# EAGLE board 909 Rim_potless (EAGLE 7.1.0)
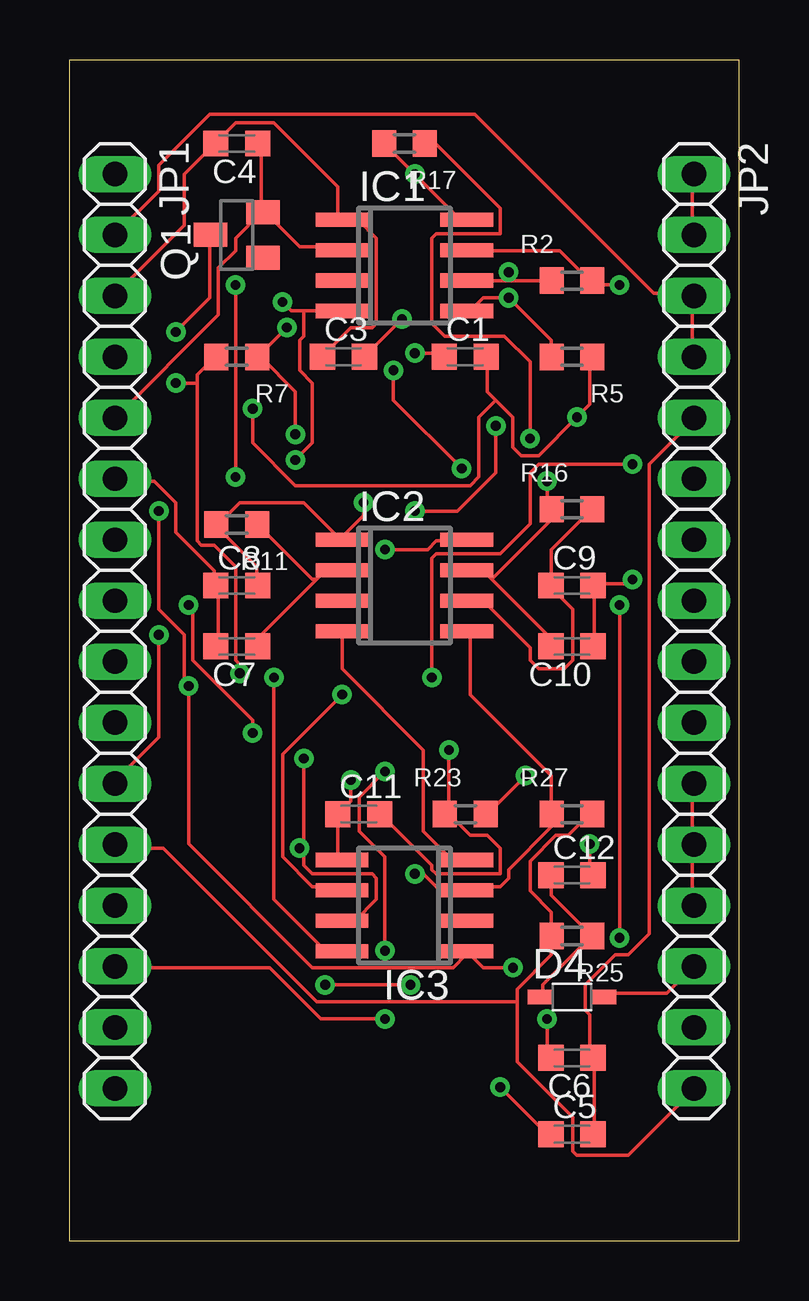
[diagram p0: board, top side]
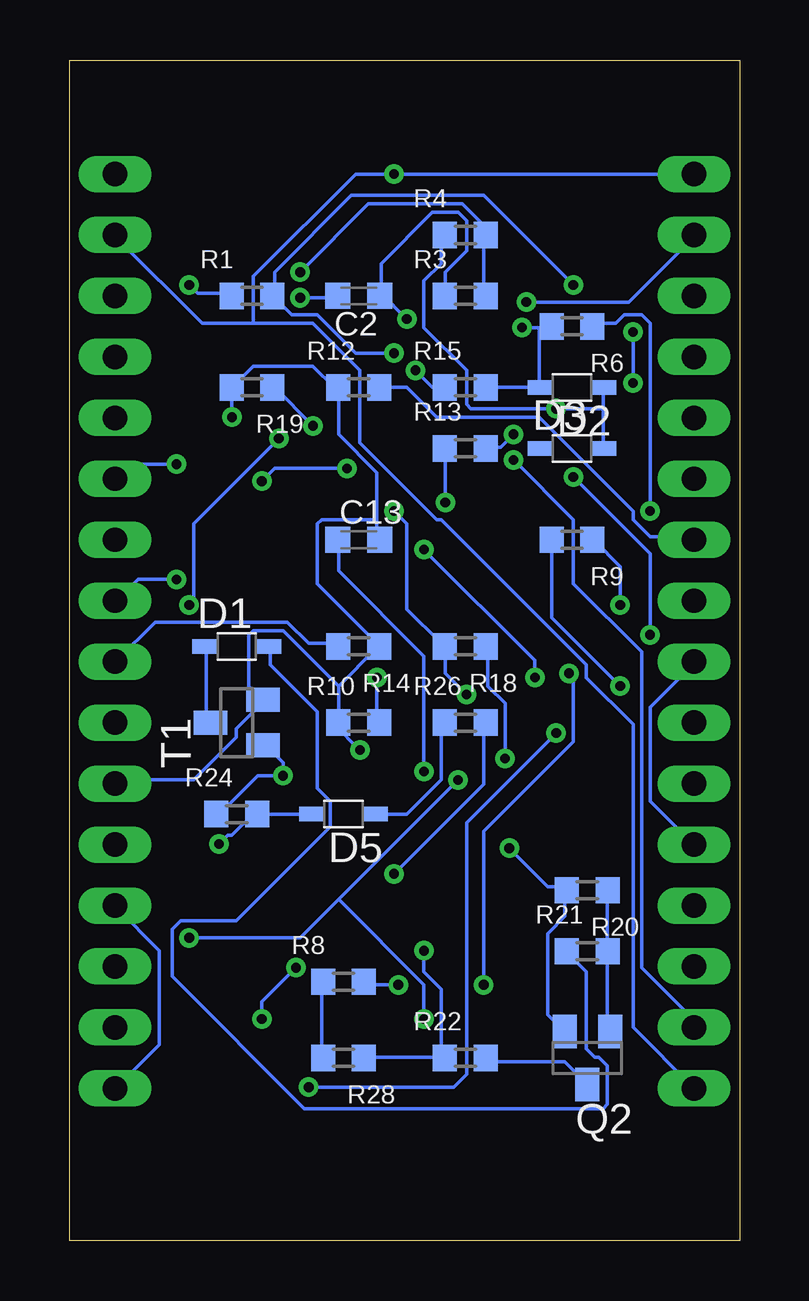
[diagram p1: board, bottom side, seen from below]

Size 27.92 x 49.2 mm. Coordinates in mm from the lower left corner, seen from the top.
Outline: 0,0 27.92,0 27.92,49.2 0,49.2 0,0
Copper layers (1*16): Top 0.035mm / dielectric 1.5mm / Bottom 0.035mm
Design rules "default *": minimum track width 6mil, minimum drill 16mil, track to track 8mil, track to pad 8mil, pad to pad 8mil, via to via 8mil, smd to smd 8mil, copper to edge 40mil, drill to drill 8mil, minimum pad ring 10mil, minimum via ring 8mil, stop-mask expansion 4mil, vias tented up to drill 0mil, thermal gap 10mil

## Footprints (pad centres in the part's own frame; a part is rotated, then mirrored left to right if it is on the bottom)
C0603K = smd 1.05 x 1.08: 1 -0.875,0; 2 0.875,0
SOD323W_INFINEON = smd 1 x 0.6: A 1.35,0; C -1.35,0
SO08 = smd 0.6 x 2.2: 1 -1.905,-2.6; 2 -0.635,-2.6; 3 0.635,-2.6; 4 1.905,-2.6; 5 1.905,2.6; 6 0.635,2.6; 7 -0.635,2.6; 8 -1.905,2.6
1X16 = drill 1.016 long: 1 -19.05,0; 2 -16.51,0; 3 -13.97,0; 4 -11.43,0; 5 -8.89,0; 6 -6.35,0; 7 -3.81,0; 8 -1.27,0; 9 1.27,0; 10 3.81,0; 11 6.35,0; 12 8.89,0; 13 11.43,0; 14 13.97,0; 15 16.51,0; 16 19.05,0
SOT23 = smd 1 x 1.4: 1 -0.95,-1.1; 2 0.95,-1.1; 3 0,1.1
SOT23-BEC = smd 1 x 1.4: B -0.95,-1.1; C 0,1.1; E 0.95,-1.1
R0603 = smd 1 x 1.1: 1 -0.85,0; 2 0.85,0

## Placement (x,y rotation side)
C1  0.33uF  [C0603K]  16.51,36.83 0 top
C2  0.33uF  [C0603K]  15.88,39.37 180 bottom
C3  0.33uF  [C0603K]  11.43,36.83 0 top
C4  0.33uF  [C0603K]  6.99,45.72 180 top
C5  0.33uF  [C0603K]  20.95,4.45 0 top
C6  0.33uF  [C0603K]  20.95,7.62 180 top
C7  0.33uF  [C0603K]  6.99,24.77 180 top
C8  0.33uF  [C0603K]  6.99,27.3 0 top
C9  0.33uF  [C0603K]  20.95,27.3 0 top
C10  0.33uF  [C0603K]  20.95,24.77 180 top
C11  100pF  [C0603K]  12.06,17.78 0 top
C12  0.33uF  [C0603K]  20.95,15.24 0 top
C13  0.33uF  [C0603K]  15.88,29.21 0 bottom
D1  1N4148  [SOD323W_INFINEON]  20.95,24.77 0 bottom
D2  1N4148  [SOD323W_INFINEON]  6.99,35.56 180 bottom
D3  1N4148  [SOD323W_INFINEON]  6.99,33.02 0 bottom
D4  1N4148  [SOD323W_INFINEON]  20.95,10.16 0 top
D5  1N4148  [SOD323W_INFINEON]  16.51,17.78 180 bottom
IC1  TL072D  [SO08]  13.97,40.64 270 top
IC2  TL072D  [SO08]  13.97,27.3 270 top
IC3  TL072D  [SO08]  13.97,13.97 90 top
JP1  [1X16]  1.91,25.4 270 top
JP2  [1X16]  26.04,25.4 270 top
Q1  BC549  [SOT23]  6.99,41.91 90 top
Q2  BC859  [SOT23-BEC]  6.35,7.62 180 bottom
R1  1K  [R0603]  20.32,39.37 0 bottom
R2  4.7K  [R0603]  20.95,40.01 0 top
R3  22K  [R0603]  11.43,39.37 0 bottom
R4  4.7K  [R0603]  11.43,41.91 0 bottom
R5  220K  [R0603]  20.95,36.83 180 top
R6  22K  [R0603]  6.99,38.1 180 bottom
R7  22K  [R0603]  6.99,36.83 180 top
R8  680R  [R0603]  16.51,10.79 0 bottom
R9  22K  [R0603]  6.99,29.21 180 bottom
R10  22K  [R0603]  15.88,21.59 0 bottom
R11  22K  [R0603]  6.99,29.84 180 top
R12  22K  [R0603]  15.88,35.56 0 bottom
R13  22K  [R0603]  11.43,33.02 0 bottom
R14  22K  [R0603]  15.88,24.77 180 bottom
R15  22K  [R0603]  11.43,35.56 0 bottom
R16  22K  [R0603]  20.95,30.48 0 top
R17  100k  [R0603]  13.97,45.72 180 top
R18  10k  [R0603]  11.43,24.77 180 bottom
R19  4.7k  [R0603]  20.32,35.56 180 bottom
R20  [R0603]  6.35,14.61 180 bottom
R21  [R0603]  6.35,12.06 0 bottom
R22  [R0603]  11.43,7.62 0 bottom
R23  [R0603]  16.51,17.78 0 top
R24  [R0603]  20.95,17.78 0 bottom
R25  [R0603]  20.95,12.7 180 top
R26  [R0603]  11.43,21.59 0 bottom
R27  [R0603]  20.95,17.78 0 top
R28  [R0603]  16.51,7.62 180 bottom
T1  BC849  [SOT23]  20.95,21.59 90 bottom

## Library data of the parts
C1-C13 = resistor
D1-D5 = 0000-master
IC1-IC3 = linear
JP1 JP2 = pinhead
Q1 T1 = transistor-neu-to92
Q2 = transistor-pnp
R1-R28 = resistor; SPICEPREFIX: R

## Nets
+12V: IC1.8 JP1.1 JP1.16 JP2.1 JP2.2 R17.2
-12V: IC1.4 JP1.2 JP1.15 JP2.3 JP2.4
ACC_NORM: JP1.13
ACC_TIP: C11.1 IC3.5 JP1.14 R17.1
GND: C1.2 C11.2 C13.2 D2.C D3.A JP1.9 JP1.12 JP2.11 JP2.12 JP2.13 JP2.16 R4.1 R5.1 R10.1 R12.1 R14.1 R19.2 R23.1 R25.2 R27.2 T1.2
N$1: IC1.7 R1.1 R2.2
N$3: C2.1 C3.2 R3.1
N$4: C2.2 IC1.5 R5.2
N$5: IC1.6 R2.1 R3.2 R4.2
N$8: D2.A R6.2 R7.1 R13.2 R15.2
N$9: C6.2 IC3.1 R6.1 R9.2
N$10: Q1.3 R7.2 R8.2
N$11: C5.1 R9.1
N$15: C10.2 IC2.7 R15.1 R16.1
N$17: C8.2 IC2.1 R11.2 R13.1
N$18: C9.1 IC2.6 R16.2
N$19: R8.1 R28.2
N$21: IC3.6 R18.2 R19.1
N$22: IC3.7 Q2.E R18.1 R20.2
N$23: Q2.B R20.1 R21.2
N$24: Q2.C R22.2
N$25: D1.A R21.1
N$26: D5.C R26.1
N$27: C12.1 D4.C R25.1
N$28: C12.2 D5.A R24.2
N$29: IC2.5 IC3.3 R26.2 R27.1
N$30: R23.2 R24.1 T1.1
N$31: D1.C T1.3
N$32: C13.1 R22.1 R28.1
N$37: C7.1 IC2.2 R11.1
OUT_NORM: JP1.10
OUT_TIP: C1.1 JP1.11 R1.2
POT1_1: C3.1 C4.2 IC1.1 JP1.3
POT1_2: JP1.4
POT1_3: C4.1 IC1.2 JP1.5 Q1.2
POT2_1: C5.2 C6.1 JP2.5
POT2_2: JP2.6 R10.2
POT2_3: JP2.7
POT3_1: C7.2 C8.1 JP1.6
POT3_2: JP1.7 R12.2
POT3_3: JP1.8
POT4_1: C9.2 C10.1 JP2.8
POT4_2: JP2.9 R14.2
POT4_3: JP2.10
TRIG_NORM: JP2.15
TRIG_TIP: D4.A JP2.14
V+: IC2.8 IC3.8
V-: IC2.4 IC3.4

## Tracks (layer width: path | path; a pad name or v marks a point on that pad's centre or on a via)
+12V  (via drill 0.41)
  Top 0.152: R17.2 13.16,45.7 v14.4,44.45 16.18,42.67 16.54,42.67 IC1.8 | JP2.1 25.96,44.45 25.96,41.96 JP2.2
  Bottom 0.152: JP1.16 4.45,8.89 4.45,21.51 6.4,23.47 6.4,24 12.45,30.05 12.62,30.05 15.82,33.25 15.82,36.27 17.78,38.23 20.27,38.23 | 20.27,38.23 22.4,38.23 25.96,41.78 JP2.2 | JP1.1 v14.4,44.45 16,44.45 20.27,40.18 20.27,38.23
-12V  (via drill 0.41)
  Top 0.152: JP2.4 25.96,36.98 25.96,39.29 JP2.3 25.96,39.47 24.36,39.47 16.89,46.94 5.87,46.94 3.73,44.81 3.73,43.74 JP1.2 | 9.78,38.76 9.25,38.76 v8.89,39.12 | 9.78,38.76 11.2,38.76 IC1.4 | v9.42,32.54 10.13,33.25 10.13,35.74 9.6,36.27 9.6,37.52 9.78,37.69 9.78,38.76
  Bottom 0.152: v8.89,39.12 4.62,39.12 1.96,41.78 JP1.2 | v9.42,32.54 6.93,30.05 6.93,27.38 4.09,24.54 4.09,11.38 1.96,9.25 1.96,8.89 JP1.15
ACC_TIP  (via drill 0.41)
  Top 0.152: 11.2,17.78 11.2,16 IC3.5 | v19.2,33.43 19.2,36.63 18.14,37.69 15.65,37.69 15.11,38.23 15.11,41.78 15.29,41.96 17.96,41.96 17.96,43.03 15.29,45.7 14.94,45.7 R17.1 | v22.94,12.62 v22.94,26.49 | v11.73,19.2 11.73,18.31 11.2,17.78 | 11.2,17.78 C11.1 | v13.16,9.25 10.49,9.25 8.36,11.38 1.96,11.38 JP1.14
  Bottom 0.152: v19.2,33.43 22.76,29.87 22.76,26.67 v22.94,26.49 | v22.94,12.62 18.31,12.62 16.71,14.22 | v11.73,19.2 16.71,14.22 | v13.16,9.25 13.16,10.67 16.71,14.22
GND  (via drill 0.41)
  Top 0.152: 17.78,35.03 18.49,34.31 18.49,33.07 18.85,32.72 19.56,32.72 v21.16,34.31 21.69,34.85 21.69,36.8 R5.1 | 17.78,35.03 17.42,35.38 17.42,36.8 C1.2 | 15.82,17.78 16.71,16.89 17.42,16.89 17.96,16.36 17.96,15.29 15.29,15.29 15.11,15.47 15.11,15.65 12.98,17.78 C11.2 | v15.82,20.45 15.82,17.78 | 15.82,17.78 R23.1 | v7.64,34.67 7.64,33.25 9.42,31.47 16.71,31.47 17.07,31.83 17.07,34.31 17.78,35.03 | R27.2 21.69,17.78 20.8,16.89 20.27,16.89 19.2,15.82 19.2,14.58 20.09,13.69 20.09,12.8 R25.2 20.09,12.62 20.09,11.91 18.67,10.49 18.67,9.96 | JP2.13 25.96,14.05 25.96,16.36 JP2.12 25.96,16.54 25.96,19.02 JP2.11 | 18.67,9.96 18.67,7.47 20.98,5.16 20.98,3.73 21.16,3.56 23.29,3.56 25.96,6.22 JP2.16 | 18.67,9.96 10.31,9.96 3.91,16.36 1.96,16.36 JP1.12
  Bottom 0.152: 5.69,34.67 5.69,35.56 D2.C | 5.69,34.67 5.69,33.07 D3.A | 5.69,34.67 v7.64,34.67 11.2,34.67 11.38,34.85 11.38,36.27 13.16,38.05 13.16,40.01 12.45,40.72 12.45,41.78 R4.1 | 15.11,30.05 15.11,32 16.71,33.6 16.71,35.56 R12.1 16.89,35.56 17.78,36.45 20.27,36.45 21.16,35.56 | 15.11,30.05 15.11,29.34 C13.2 | 21.16,35.56 v21.16,34.31 | 21.16,35.56 R19.2 | 16.71,23.11 15.11,24.71 R14.1 15.11,24.89 17.6,27.38 17.6,29.87 17.42,30.05 15.11,30.05 | 16.71,23.11 16.71,21.69 R10.1 16.89,21.51 v15.82,20.45 | JP2.11 25.96,19.2 22.76,19.2 20.98,20.98 20.98,21.34 19.91,22.4 T1.2 19.91,22.58 20.45,23.11 20.45,25.25 20.27,25.43 19.02,25.43 16.71,23.11 | JP1.12 1.96,16.54 3.73,18.31 3.73,22.23 1.96,24 JP1.9 | JP2.16 25.96,6.4 24.18,8.18 24.18,12.09 25.96,13.87 JP2.13
N$1  (via drill 0.41)
  Top 0.152: v22.94,39.83 22.05,39.83 21.87,40.01 R2.2 21.69,40.01 20.45,41.25 16.71,41.25 IC1.7
  Bottom 0.152: v22.94,39.83 22.58,39.47 21.34,39.47 R1.1
N$3  (via drill 0.41)
  Top 0.152: v13.87,38.41 12.45,36.98 C3.2
  Bottom 0.152: 14.94,39.47 v13.87,38.41 | 14.94,39.47 14.94,40.72 12.8,42.85 11.73,42.85 11.38,42.49 11.38,41.25 12.27,40.36 12.27,39.47 R3.1 | 14.94,39.47 C2.1
N$4  (via drill 0.41)
  Top 0.152: IC1.5 16.71,38.76 17.25,39.29 v18.31,39.29 20.09,37.52 20.09,36.98 R5.2
  Bottom 0.152: v18.31,39.29 16.89,39.29 C2.2
N$5  (via drill 0.41)
  Top 0.152: IC1.6 18.31,40.01 | 18.31,40.01 R2.1 | 18.31,40.01 v18.31,40.36
  Bottom 0.152: R3.2 10.67,39.47 10.67,41.78 R4.2 10.67,41.96 10.67,42.32 11.56,43.2 15.47,43.2 v18.31,40.36
N$8  (via drill 0.41)
  Top 0.152: v9.07,38.05 8,36.98 R7.1 8,36.8 9.42,35.38 v9.42,33.6
  Bottom 0.152: R15.2 8.36,35.56 | 8.36,38.05 8,38.05 R6.2 | 8.36,38.05 v9.07,38.05 | v9.42,33.6 9.96,33.07 10.49,33.07 R13.2 | 8.36,38.05 8.36,35.56 | 8.36,35.56 D2.A
N$9  (via drill 0.41)
  Top 0.152: v19.91,9.25 19.91,7.64 C6.2 | v18.49,11.38 17.25,11.38 16.71,11.91 IC3.1 16.54,11.91 16,11.38 10.13,11.38 4.98,16.54 v4.98,23.11 4.8,23.29 4.8,25.25 3.73,26.31 v3.73,30.4
  Bottom 0.152: v19.91,9.25 19.91,9.96 v18.49,11.38 | v4.98,23.11 7.82,25.96 7.82,29.16 R9.2 | v3.73,30.4 3.73,38.23 4.09,38.58 4.8,38.58 5.16,38.23 6.04,38.23 R6.1
N$10  (via drill 0.41)
  Top 0.152: v10.67,10.67 v14.22,10.67 | v7.11,23.65 7.11,24 6.93,24.18 6.93,28.09 6.04,28.98 5.51,28.98 5.33,29.16 5.33,35.74 | 5.33,35.74 5.33,36.09 6.04,36.8 R7.2 | v4.45,37.87 5.87,39.29 5.87,41.78 Q1.3 | 5.33,35.74 v4.45,35.74
  Bottom 0.152: v14.22,10.67 15.65,10.67 R8.2 | v10.67,10.67 10.67,17.07 6.93,20.8 6.93,23.47 v7.11,23.65 | v4.45,35.74 v4.45,37.87
N$11  (via drill 0.41)
  Top 0.152: v17.96,6.4 19.91,4.45 C5.1 | v7.64,21.16 7.64,21.69 5.16,24.18 5.16,26.31 v4.98,26.49
  Bottom 0.152: v17.96,6.4 11.91,6.4 11.38,6.93 11.38,17.42 v7.64,21.16 | v4.98,26.49 4.98,28.09 6.04,29.16 R9.1
N$15  (via drill 0.41)
  Top 0.152: 17.6,27.56 17.25,27.91 16.71,27.91 IC2.7 | 17.6,27.56 19.91,25.25 19.91,24.89 C10.2 | v13.51,36.27 13.51,35.03 v16.36,32.18 | v19.91,31.65 19.91,30.76 20.09,30.58 R16.1 20.09,30.4 20.09,30.05 17.6,27.56
  Bottom 0.152: R15.1 12.8,35.56 v13.51,36.27 | v16.36,32.18 19.38,32.18 v19.91,31.65
N$17  (via drill 0.41)
  Top 0.152: C8.2 7.82,27.38 7.82,28.09 6.22,29.69 R11.2 6.22,29.87 7.11,30.76 9.78,30.76 11.2,29.34 IC2.1 11.38,29.34 12.27,30.23 v12.27,30.76
  Bottom 0.152: v12.27,30.76 12.27,32.89 R13.1
N$18
  Top 0.152: R16.2 21.69,30.4 20.09,28.8 20.09,27.38 C9.1 20.09,27.2 20.98,26.31 20.98,24.18 20.62,23.82 19.56,23.82 19.2,24.18 19.2,24.71 17.25,26.67 IC2.6
N$19
  Bottom 0.152: R28.2 17.42,7.64 17.42,10.67 R8.1
N$21  (via drill 0.41)
  Top 0.152: v11.38,22.76 8.89,20.27 8.89,16 10.13,14.76 11.2,14.76 IC3.6 | v17.78,33.96 17.78,32 16.18,30.4 v14.4,30.4
  Bottom 0.152: v11.38,22.76 12.27,23.65 12.27,24.71 R18.2 12.45,24.89 13.87,26.31 13.87,29.87 v14.4,30.4 | v17.78,33.96 19.38,35.56 R19.1
N$22  (via drill 0.41)
  Top 0.152: 9.78,16.36 9.78,15.65 10.13,15.29 12.62,15.29 12.8,15.11 12.8,14.22 11.91,13.34 IC3.7 | 9.78,16.36 v9.78,20.09 | 9.78,16.36 v9.6,16.36
  Bottom 0.152: Q2.E 7.47,8.89 8,9.42 8,12.8 7.29,13.51 7.29,14.58 R20.2 7.29,14.76 8,14.76 v9.6,16.36 | v9.78,20.09 9.78,22.4 10.49,23.11 10.49,24.71 R18.1
N$23
  Bottom 0.152: R20.1 5.51,14.58 5.51,12.09 R21.2 5.51,11.91 5.51,8.89 Q2.B
N$24
  Bottom 0.152: R22.2 10.49,7.47 7.29,7.47 6.4,6.58 Q2.C
N$25
  Bottom 0.152: D1.A 19.56,24.71 19.56,24 17.6,22.05 17.6,18.85 17.07,18.31 17.07,17.25 20.98,13.34 23.29,13.34 23.65,12.98 23.65,11.02 18.14,5.51 5.69,5.51 5.51,5.69 5.51,7.29 5.87,7.64 6.04,7.64 6.4,8 6.4,11.2 7.11,11.91 R21.1
N$26
  Bottom 0.152: D5.C 13.87,17.78 12.45,19.2 12.45,21.51 R26.1
N$27
  Top 0.152: D4.C 19.74,10.31 19.74,10.67 21.69,12.62 R25.1 21.69,12.8 20.09,14.4 20.09,15.11 C12.1
N$28  (via drill 0.41)
  Top 0.152: v21.69,16.54 21.69,15.29 C12.2
  Bottom 0.152: D5.A R24.2 20.27,17.78 21.16,16.89 21.34,16.89 v21.69,16.54
N$29  (via drill 0.41)
  Top 0.152: v14.4,15.29 14.76,15.29 15.29,14.76 16.54,14.76 IC3.3 16.71,14.76 17.96,14.76 18.31,15.11 18.31,15.47 20.09,17.25 R27.1 | R27.1 20.09,19.38 16.71,22.76 16.71,25.25 IC2.5 | R27.1
  Bottom 0.152: v14.4,15.29 10.67,19.02 10.67,21.51 R26.2
N$30  (via drill 0.41)
  Top 0.152: v19.02,19.38 17.42,17.78 R23.2
  Bottom 0.152: T1.1 19.74,20.62 19.02,19.91 v19.02,19.38 20.09,19.38 21.69,17.78 R24.1
N$31
  Bottom 0.152: D1.C 22.23,24.71 22.23,21.69 T1.3
N$32  (via drill 0.41)
  Top 0.152: v13.16,19.56 12.09,18.49 12.09,17.07 13.16,16 v13.16,12.09
  Bottom 0.152: v13.16,19.56 13.16,24.36 16.71,27.91 16.71,29.16 C13.1 | v13.16,12.09 13.16,11.2 12.45,10.49 12.45,7.64 | 12.45,7.64 15.65,7.64 R28.1 | 12.45,7.64 R22.1
N$37
  Top 0.152: 10.31,27.56 10.67,27.91 11.2,27.91 IC2.2 | 10.31,27.56 8,25.25 8,24.89 C7.1 | 10.31,27.56 10.13,27.56 8,29.69 R11.1
OUT_TIP  (via drill 0.41)
  Top 0.152: v14.4,36.98 15.47,36.98 C1.1 | v3.73,25.25 3.73,20.98 1.96,19.2 JP1.11 | v6.93,39.83 v6.93,31.83
  Bottom 0.152: v14.4,36.98 16,36.98 17.6,38.58 18.67,38.58 19.38,39.29 R1.2 19.38,39.47 19.38,40.36 16.18,43.56 10.67,43.56 v6.93,39.83 | v3.73,25.25 3.73,28.63 v6.93,31.83
POT1_1
  Top 0.152: C3.1 10.67,36.98 11.73,38.05 12.62,38.05 12.8,38.23 12.8,41.78 12.09,42.49 11.38,42.49 IC1.1 11.2,42.67 11.2,43.92 8.53,46.58 6.93,46.58 6.22,45.87 C4.2 6.04,45.7 4.8,44.45 4.8,42.32 1.96,39.47 JP1.3
POT1_3
  Top 0.152: C4.1 8,45.7 8,43.03 Q1.2 | IC1.2 11.2,41.43 9.6,41.43 8.18,42.85 Q1.2 | JP1.5 1.96,34.31 6.22,38.58 6.22,40.54 6.93,41.25 6.93,41.78 8,42.85 Q1.2
POT2_1
  Top 0.152: C5.2 21.87,4.45 21.87,7.47 C6.1 21.69,7.64 21.69,9.42 21.51,9.6 21.51,10.67 22.76,11.91 23.29,11.91 24.18,12.8 24.18,32.36 25.96,34.14 JP2.5
POT2_2  (via drill 0.41)
  Top 0.152: v15.11,23.47 15.11,28.45 15.29,28.63 17.96,28.63 19.2,29.87 19.2,32 19.56,32.36 v23.47,32.36
  Bottom 0.152: v15.11,23.47 15.11,21.69 R10.2 | v23.47,32.36 25.43,32.36 JP2.6
POT3_1
  Top 0.152: C7.2 6.22,24.89 6.22,27.2 C8.1 6.04,27.38 6.04,27.91 4.45,29.52 4.45,30.76 3.56,31.65 1.96,31.65 JP1.6
POT3_2
  Bottom 0.152: R12.2 13.87,35.56 12.62,34.31 8.36,34.31 4.45,30.4 4.45,30.05 3.73,29.34 1.96,29.34 JP1.7
POT4_1  (via drill 0.41)
  Top 0.152: C10.1 21.87,24.89 21.87,27.2 C9.2 21.87,27.38 23.29,27.38 v23.47,27.56
  Bottom 0.152: v23.47,27.56 25.07,27.56 25.96,26.67 JP2.8
POT4_2
  Bottom 0.152: R14.2 16.89,24.89 17.96,24.89 18.85,25.78 24.36,25.78 25.96,24.18 JP2.9
TRIG_TIP
  Top 0.152: D4.A 22.4,10.31 24.89,10.31 25.96,11.38 JP2.14
V+  (via drill 0.41)
  Top 0.152: v8.53,23.47 8.53,14.22 10.67,12.09 11.2,12.09 IC3.8 | v13.16,28.8 14.94,28.8 15.29,29.16 16.54,29.16 IC2.8
  Bottom 0.152: v8.53,23.47 8.53,24.18 v13.16,28.8
V-
  Top 0.152: IC2.4 11.38,25.25 11.38,23.82 14.76,20.45 14.76,17.07 15.82,16 16.54,16 IC3.4